# Altium PCB Li-IonBatteryManager.PcbDoc
Units mm, origin at the board's own origin, x right, y up, seen from the top; angles counter-clockwise.
Board outline 42.8 x 25.52 mm, 2 copper layers (Top Layer, Bottom Layer); 31 components, 24 nets, 122 pads, 61 vias.
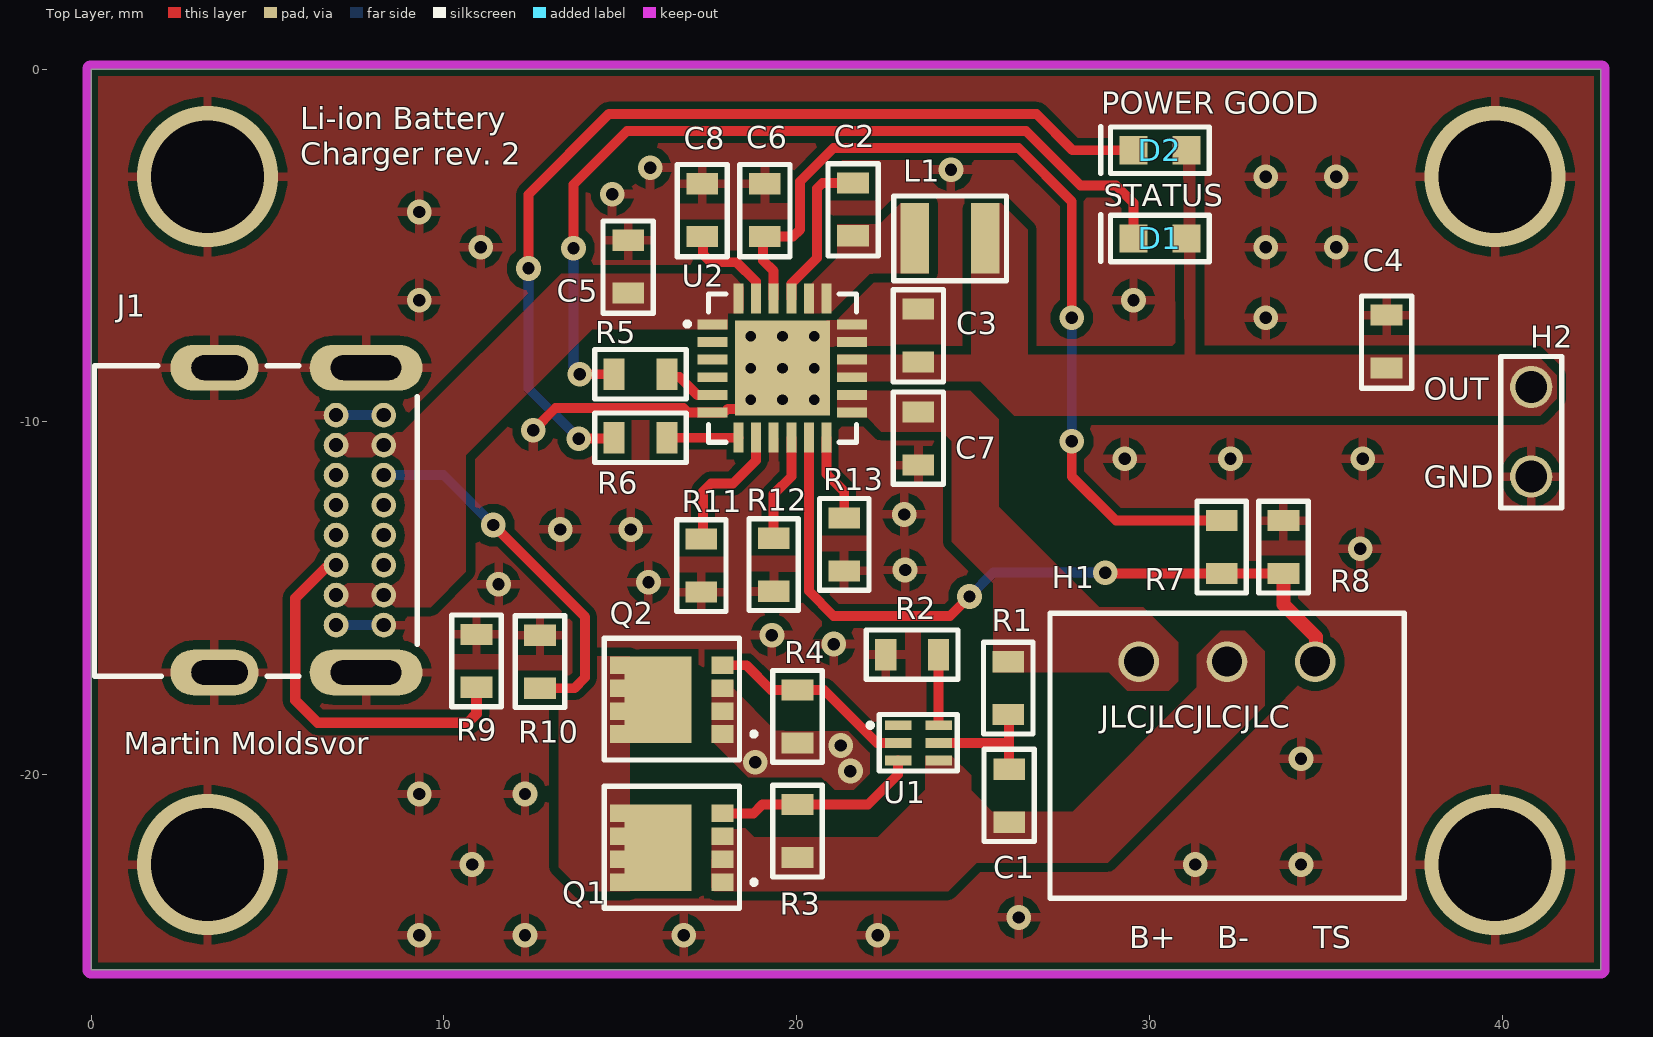
[diagram p0: Top Layer view]
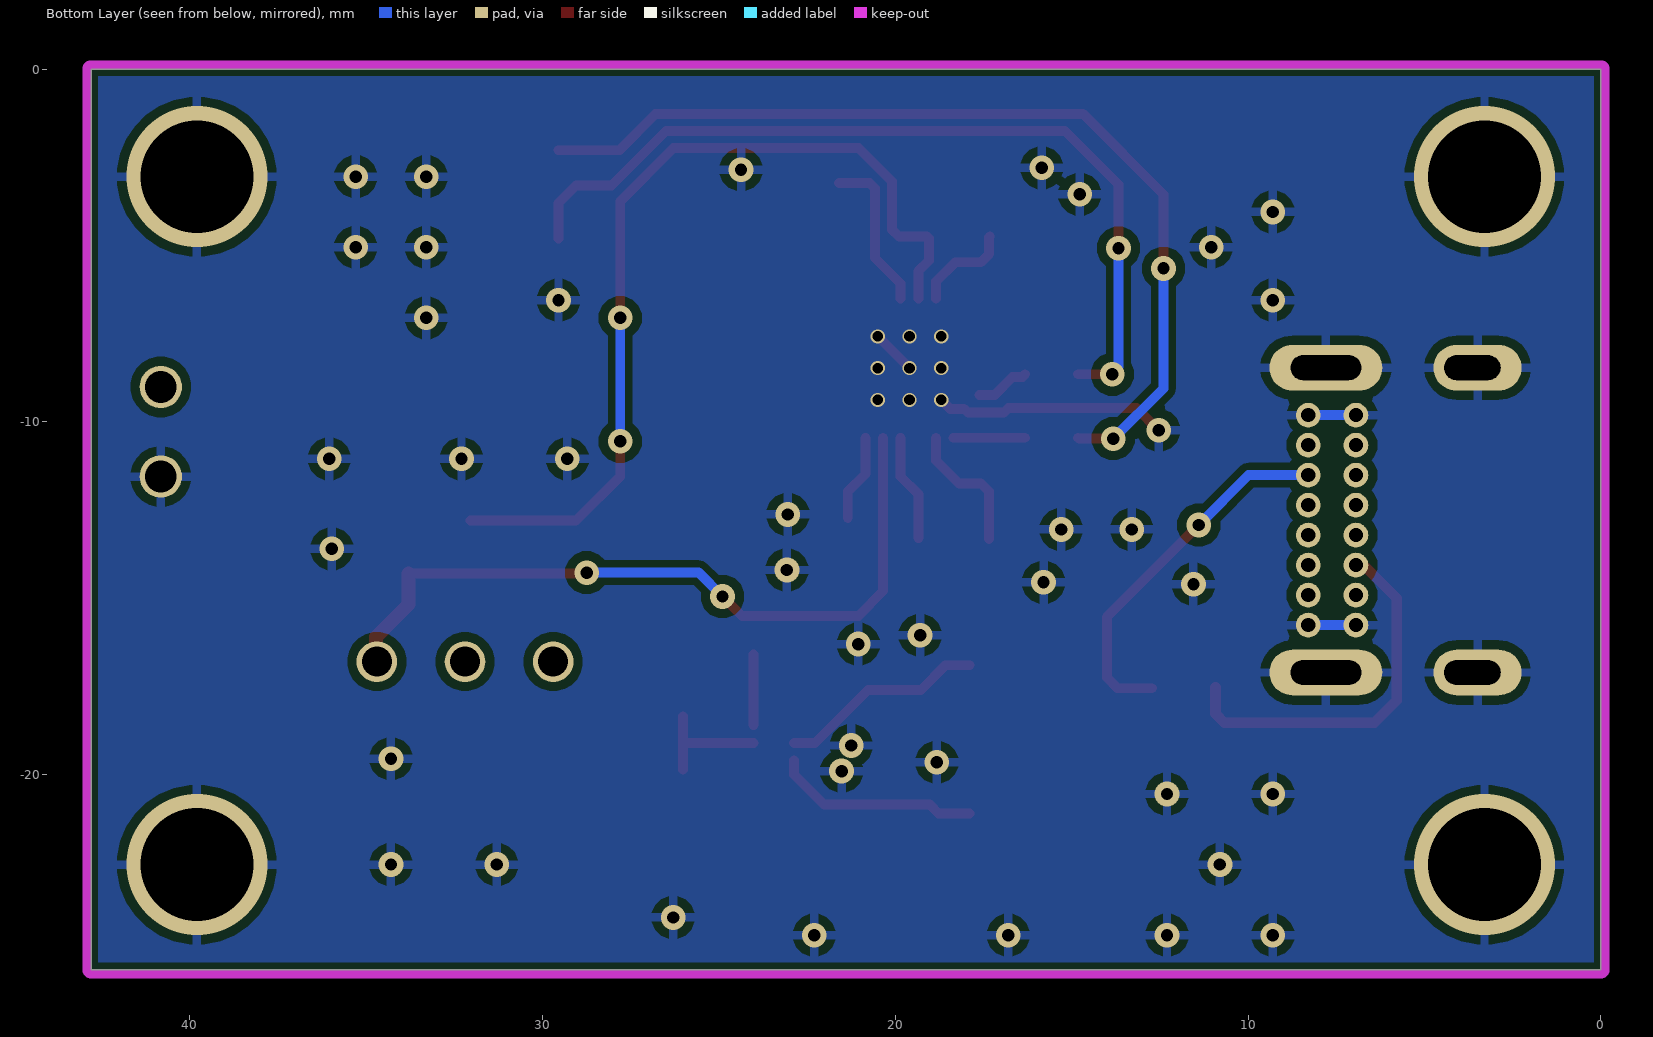
[diagram p1: Bottom Layer view, seen from below]
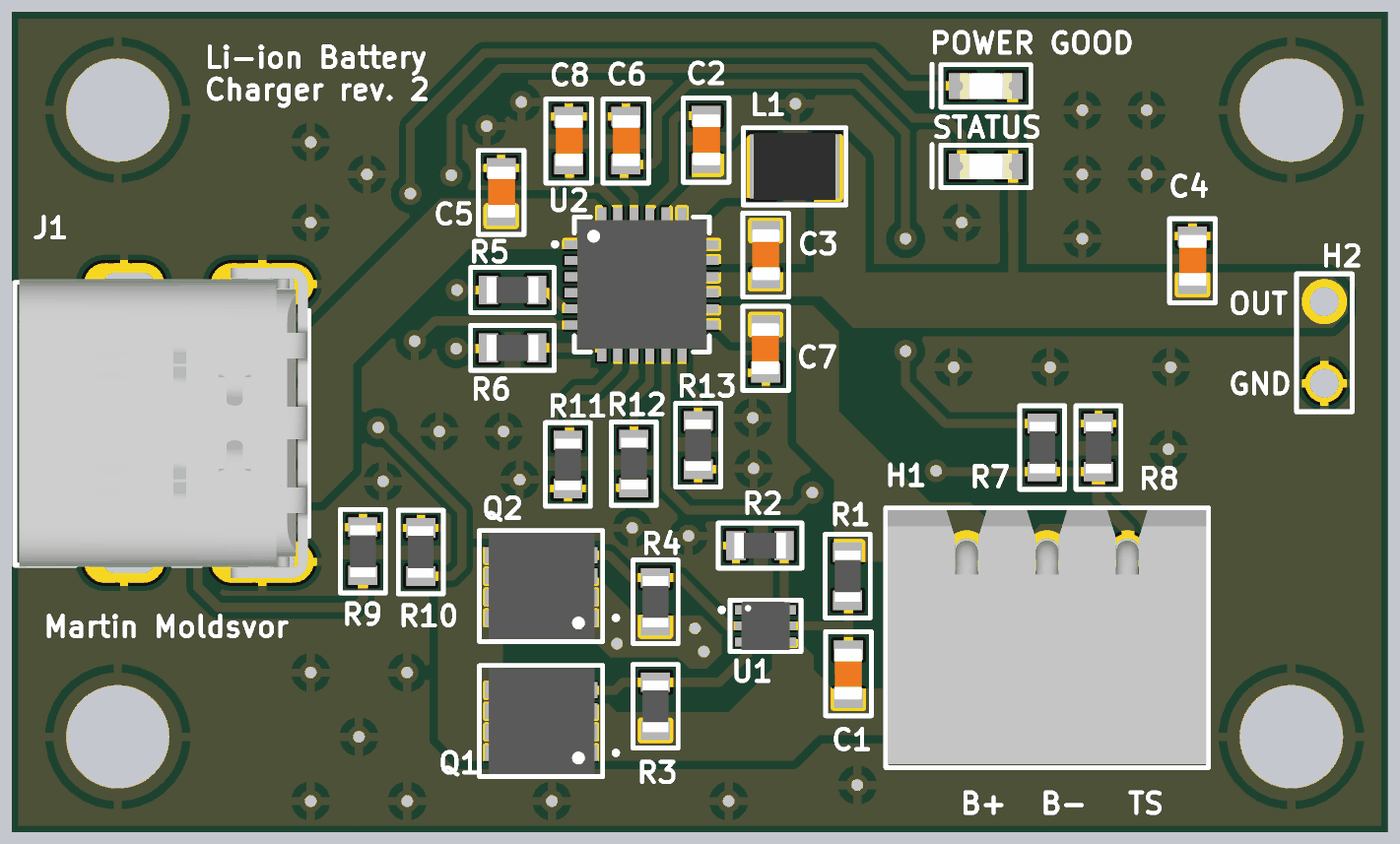
[diagram p2: 3D render of the assembled board from above, using the file's embedded part models]

## Layer stack, top to bottom
Top Solder: solder mask 0.0102, Solder Resist, Dk 3.5
Top Layer: signal copper 0.0356
Dielectric 1: dielectric 0.32, FR-4, Dk 4.8
Bottom Layer: signal copper 0.0356
Bottom Solder: solder mask 0.0102, Solder Resist, Dk 3.5

## Board outline
0,-25.525 42.8,-25.525 42.8,0 0,0

## Design rules (kind name [scope] priority, off if disabled: settings)
Clearance [All] p1: gap=0.254 ignorepadtopadclearanceinfootprint=FALSE except(0: Arc-Hole Track-Hole SMDPad-Hole THPad-Hole Via-Hole Fill-Hole Poly-Hole Region-Hole Text-Hole; 0.2: Arc-Arc Arc-Track Arc-Fill Arc-Poly Arc-Region Track-Track Track-Fill Track-Poly Track-Region SMDPad-SMDPad SMDPad-Fill SMDPad-Poly SMDPad-Region)
HoleSize [All] p1: absolutevalues=TRUE maxlimit=3.2 minlimit=0.025 maxpercent=80.000 minpercent=20.000
PolygonConnect PolygonConnect2 [(InNet('CELL-') OR InNet('PACK+') OR InNet('PACK-') OR InNet('NetQ1_5') OR InNet('VBUS') OR InNet('SW') OR InNet('C_BAT') OR InNet('SYS') OR IsNamedPolygon('PACK_GND_POUR') OR IsNamedPolygon('GND_CHARGER_POUR') OR IsNamedPolygon('GND_CHARGER_IC_POUR'))] p1: connectstyle=Direct reliefconductorwidth=0.254 reliefentries=4 polygonreliefangle="90 Angle" airgapwidth=0.254
PolygonConnect [All] p2: connectstyle=Relief reliefconductorwidth=0.254 reliefentries=4 polygonreliefangle="90 Angle" airgapwidth=0.254
RoutingVias [All] p1: holewidth=0.711 width=1.27 viastyle="Through Hole" minholewidth=0.711 minwidth=1.27 maxholewidth=0.711 maxwidth=1.27
SolderMaskExpansion [All] p1: expansion=0.102 istentingtop=FALSE
Width [All] p1: maxlimit=0.6 minlimit=0.2 preferedwidth=0.3 minimp=50.000000 maximp=50.000000 favimp=50.000000
29 further rules are at their usual default settings.

## Classes and differential pairs
component class BatteryManagerRev2: C1 C2 C3 C6 C8 D1 D2 H1 H2 J1 L1 Q1 Q2 R1 R2 R3 R4 R5 R6 R7 R8 R9 R10 R11 R12 R13 U1 U2

## Components (designator, comment, footprint, x,y, rotation, side; value= is the part's Value field where it differs from the comment)
C1 "0.1uF" "0603 Capacitor" 26.025,-20.6 r90 top
C2 "47nF" "0603 Capacitor" 21.6,-3.975 r270 top
C3 "Capacitor" "0603 Capacitor" 23.45,-7.55 r270 top
C4 "Capacitor" "0603 Capacitor" 36.725,-7.725 r270 top
C5 "1uF" "0603 Capacitor" 15.225,-5.6 r270 top
C6 "4.7uF" "0603 Capacitor" 19.1,-4 r270 top
C7 "10uF" "0603 Capacitor" 23.45,-10.475 r90 top
C8 "10uF" "0603 Capacitor" 17.325,-4 r270 top
D1 "STATUS" "0603 LED" 30.3,-4.8 r180 top
D2 "POWER GOOD" "0603 LED" 30.3,-2.3 r180 top
H1 "22-05-7035" "Molex Header 3" 29.7,-16.8 r0 top
H2 "Header 2x1" "HEADER 2x1" 40.825,-9.01 r270 top
J1 "2137160001" "USB TYPE C Molex" 8.295,-9.81 r270 top
L1 "1uH" SRP2510A 23.35,-4.8 r0 top
Q1 "CSD16406Q3" CSD16406Q3 17.9,-23.045 r180 top
Q2 "CSD16406Q3" CSD16406Q3 17.9,-18.845 r180 top
R1 "330R" "0603 Resistor" 26,-17.55 r90 top
R2 "2.2k" "0603 Resistor" 23.275,-16.6 r0 top
R3 "5M" "0603 Resistor" 20.025,-21.6 r90 top
R4 "5M" "0603 Resistor" 20.025,-18.35 r90 top
R5 "10k" "0603 Resistor" 15.575,-8.65 r180 top
R6 "10k" "0603 Resistor" 15.575,-10.45 r180 top
R7 "5.3k" "0603 Resistor" 32.05,-13.55 r90 top
R8 "31.14k" "0603 Resistor" 33.8,-13.55 r270 top
R9 "5.1k 10%" "0603 Resistor" 10.925,-16.775 r270 top
R10 "5.1k 10%" "0603 Resistor" 12.725,-16.8 r270 top
R11 "160R" "0603 Resistor" 17.3,-14.075 r90 top
R12 "226R" "0603 Resistor" 19.35,-14.05 r90 top
R13 "FLOAT or 10k" "0603 Resistor" 21.35,-13.475 r90 top
U1 "BQ29700DSET" BQ297xx 22.875,-18.6 r0 top
U2 "BQ25616JRTWR" BQ25616 19.6,-8.475 r0 top

## Footprints (in the part's own frame and the unit in brackets; to place one, negate y for a bottom-side part, rotate by r counter-clockwise, add the part's x,y. Pads: shape width x height; smd on the part's side, far side on the other; paste and mask are expansions set on the pad)
"0603 Capacitor" [mm]
  rect 0.6x0.9 smd: 1(-0.75,0) 2(0.75,0)
  silkscreen extent -1.3,-0.71 1.32,0.71, body extent -0.8,-0.42 0.8,0.45, height 0.81
"0603 LED" [mm]
  rect 0.8x0.8 smd: 1(-0.75,0) 2(0.75,0)
  silkscreen extent -1.4,-0.67 1.68,0.66, body extent -0.8,-0.4 0.8,0.4, height 0.56
"0603 Resistor" [mm]
  rect 0.6x0.9 smd: 1(-0.75,0) 2(0.75,0)
  silkscreen extent -1.3,-0.7 1.3,0.7, body extent -0.8,-0.4 0.8,0.4, height 0.56
BQ297xx [mm]
  rect 0.75x0.28 smd mask+0.05: 1(0,0) 2(0,-0.5) 3(0,-1) 4(1.15,-1) 5(1.15,-0.5) 6(1.15,0)
  silkscreen extent -0.84,-1.3 1.68,0.3, body extent -0.17,-1.25 1.33,0.25, height 0.81
BQ25616 [mm]
  rect 0.85x0.28 smd mask+0.07: 1(-1.984,1.24) 2(-1.984,0.74) 3(-1.984,0.24) 4(-1.984,-0.26) 5(-1.984,-0.76) 6(-1.984,-1.26) 13(1.966,-1.26) 14(1.966,-0.76) 15(1.966,-0.26) 16(1.966,0.24) 17(1.966,0.74) 18(1.966,1.24)
  rect 0.28x0.85 smd mask+0.07: 7(-1.25,-1.975) 8(-0.75,-1.975) 9(-0.25,-1.975) 10(0.25,-1.975) 11(0.75,-1.975) 12(1.25,-1.975) 19(1.25,1.975) 20(0.75,1.975) 21(0.25,1.975) 22(-0.25,1.975) 23(-0.75,1.975) 24(-1.25,1.975)
  rect 2.7x2.7 smd paste-3.95 mask+0.07: 25(0,0)
  silkscreen extent -2.76,-2.1 2.1,2.1, body extent -2,-2 2,2, height 0.81
CSD16406Q3 [mm]
  rect 0.63x0.5 smd mask+0.05: 1(0,0.005) 1(0,-0.645) 1(0,-1.295) 4(0,-1.945) 5(2.87,-1.295) 5(2.87,-0.645) 5(2.87,0.005) 5(2.87,-1.945)
  rect 1.9x2.45 smd mask+0.05: 5(1.825,-0.97)
  silkscreen extent -0.95,-2.71 3.35,0.74, body extent -0.23,-2.64 3.07,0.66, height 1.11
"HEADER 2x1" [mm]
  round 1.2 hole 0.9: 1(0,0) 2(2.54,0)
  silkscreen extent -0.86,-0.86 3.43,0.86
"Molex Header 3" [mm]
  round 1.15 hole 0.85 mask+0.102: 1(0,0) 2(2.5,0) 3(5,0)
  silkscreen extent -2.51,-6.71 7.52,1.37, body extent -2.45,-6.6 7.45,1.3, height 4.91
SRP2510A [mm]
  rect 0.8x2 smd: 1(0,0) 2(2,0)
  silkscreen extent -0.6,-1.2 2.6,1.2, body extent -0.29,-1.04 2.29,1.05, height 0.97
"USB TYPE C Molex" [mm]
  round 0.7 hole 0.4: A1(0,0) A1(0,-1.35) A4(0.85,0) A4(0.85,-1.35) A5(1.7,0) A6(2.55,0) A7(3.4,0) A8(4.25,0) B1(5.95,-1.35) B1(5.95,0) B4(5.1,-1.35) B4(5.1,0) B5(4.25,-1.35) B6(3.4,-1.35) B7(2.55,-1.35) B8(1.7,-1.35)
  oval 1.3x3.2 hole 0.7 slot 2 at 90 deg: SHIELD(-1.345,-0.5) SHIELD(7.295,-0.5)
  oval 1.3x2.5 hole 0.7 slot 1.6 at 90 deg copper offset 0,-0.15: SHIELD(-1.345,-4.65) SHIELD(7.295,-4.65)
  silkscreen extent -1.4,-8.2 7.4,0.95, body extent -1.84,-8.06 7.8,0.91, height 3.17

## Part data
C1 C2 C5 C6 C7 C8: library part Capacitor
D1 D2: library part LED
H1: "Header 2.5mm SPOX,  WTB,  RA,  F/lock,  3w", Color=Natural, Contact Resistance=20mR, Current Rating=3A, Flammability Rating="UL94 V-0", Insulation Resistance=1GR, Manufacturer 1=Molex, Max Operating Temperature=105°C, Max Voltage Rating (AC)=250V, Max Voltage Rating (DC)=250.25kV, Min Operating Temperature=-40°C, Package Quantity=20000, Supplier Part Number 1=WM18901-ND, Test Voltage=1kV, Category="Headers and Wire Housings", ComponentLink1Description=https://datasheet.ciiva.com/30128/225440022057035-pcb-headers-30128301.pdf?src-supplier=Onlinecomponents.com, ComponentLink1URL=https://datasheet.ciiva.com/30128/225440022057035-pcb-headers-30128301.pdf?src-supplier=Onlinecomponents.com, ComponentLink2Description=https://datasheet.ciiva.com/11746/0900766b80da772d-11746287.pdf?src-supplier=RSComponents, ComponentLink2URL=https://datasheet.ciiva.com/11746/0900766b80da772d-11746287.pdf?src-supplier=RSComponents, ComponentLink3Description=https://datasheet.ciiva.com/5153/0022057035-pcb-headers-158546-5153221.pdf?src-supplier=Mouser, ComponentLink3URL=https://datasheet.ciiva.com/5153/0022057035-pcb-headers-158546-5153221.pdf?src-supplier=Mouser, ComponentLink4Description=https://datasheet.ciiva.com/19461/1965939-19461711.pdf?src-supplier=Jameco, ComponentLink4URL=https://datasheet.ciiva.com/19461/1965939-19461711.pdf?src-supplier=Jameco, ComponentLink5Description=https://datasheet.ciiva.com/7167/1869086-7167685.pdf?src-supplier=Newark, ComponentLink5URL=https://datasheet.ciiva.com/7167/1869086-7167685.pdf?src-supplier=Newark, Connector Type=Header, Contact Finish - Mating=TIN, Contact Gender=Male, Contact Material=Brass, Contact Plating=Tin,Copper, Contact Shape=Circular, Contact Type="Male Pin", Depth=7.9mm, Fastening Type=Detent, Gender=Male, Glow Wire Compliant=Non-compliant, Height=4.9mm, Housing Color=Natural, Housing Material=Nylon, Insulation Color=Natural, Insulation Material=Nylon, Lead Free="Lead Free", Length=9.9mm, Manufacturer Part Number 1=22-05-7035, Max Current Rating=3A, Mount="Through Hole", Number of Circuits=3, Number of Contacts=3, Number of Poles=3, Number of Positions=3, Number of Rows=1, Orientation="Right Angle", Packaging=Bulk, Pitch=2.5mm, Pricing 1="1=0.26000, 10=0.20600, 100=0.14770, 1000=0.11562, 5000=0.10278, 10000=0.09314 (USD)", Radiation Hardening=No, REACH SVHC=Unknown, RoHS=Yes, RoHS Compliant=Yes, Series="Mini-SPOX 5268", Shrouded="Yes (With)", Stock 1=4209, Supplier 1=Digi-Key, Termination=Solder, Voltage Rating=250V, Voltage Rating (DC)=250V
J1: "Type C Receptacle DIP 16PIN", Manufacturer 1=Molex, Supplier Part Number 1=900-2137160001CT-ND, Manufacturer Part Number 1=2137160001, Pricing 1="1=1.05000, 10=0.87100, 100=0.72600 (USD)", Stock 1=7827, Supplier 1=Digi-Key
L1: library part SRP2510A-1R0M, "BOURNS - SRP2510A-1R0M - INDUCTOR, 1UH, 3A, 20%, SHIELDED", Case Code (Imperial)=1008, Case Code (Metric)=2520, Current Rating=3A, DC Resistance (DCR)=54mR, Manufacturer 1=Bourns, Max Operating Temperature=125°C, Min Operating Temperature=-40°C, Ratings=AEC-Q200, Resistor Type=Wirewound, Saturation Current=3.5A, Self Resonant Frequency=94MHz, Supplier Part Number 1=SRP2510A-1R0MCT-ND, Test Frequency=1MHz, Tolerance=20%, Case/Package=1008, Category="Fixed Inductors", ComponentLink1Description=http://www.farnell.com/datasheets/2330876.pdf?src-supplier=Farnell, ComponentLink1URL=http://www.farnell.com/datasheets/2330876.pdf?src-supplier=Farnell, ComponentLink2Description=http://www.farnell.com/datasheets/2330876.pdf?src-supplier=Newark, ComponentLink2URL=http://www.farnell.com/datasheets/2330876.pdf?src-supplier=Newark, ComponentLink3Description=https://www.bourns.com/docs/Product-Datasheets/srp2510a.pdf?src-supplier=Digi-Key, ComponentLink3URL=https://www.bourns.com/docs/Product-Datasheets/srp2510a.pdf?src-supplier=Digi-Key, Core Material=Ferrite, Inductance=1uH, Manufacturer Part Number 1=SRP2510A-1R0M, Mount="Surface Mount", Packaging="Cut Tape", Pricing 1="1=0.53000, 10=0.46200, 25=0.42880, 50=0.36300, 100=0.33000, 250=0.31020, 500=0.27720, 1000=0.22440 (USD)", RoHS=Yes, RoHS Compliant=Yes, Shielding=Shielded, Stock 1=5280, Supplier 1=Digi-Key
Q1 Q2: "TEXAS INSTRUMENTS - CSD16406Q3 - N CHANNEL MOSFET, 25V, 60A, SON", Case/Package=SON, Continuous Drain Current (ID)=60A, Drain to Source Breakdown Voltage=25V, Gate to Source Voltage (Vgs)=16V, Input Capacitance=1.1nF, Manufacturer 1="Texas Instruments", Max Operating Temperature=150°C, Max Power Dissipation=2.7W, Min Operating Temperature=-55°C, Package Quantity=1, Supplier Part Number 1=296-24251-1-ND, Threshold Voltage=1.7V, Category=MOSFETs, ComponentLink1Description=https://datasheet.ciiva.com/14192/slps202a-14192882.pdf?src-supplier=Avnet, ComponentLink1URL=https://datasheet.ciiva.com/14192/slps202a-14192882.pdf?src-supplier=Avnet, ComponentLink2Description=https://datasheet.ciiva.com/6387/csd16406q3-6387192.pdf?src-supplier=Digi-Key, ComponentLink2URL=https://datasheet.ciiva.com/6387/csd16406q3-6387192.pdf?src-supplier=Digi-Key, ComponentLink3Description=https://datasheet.ciiva.com/4438/slps202a-128073-4438442.pdf?src-supplier=Mouser, ComponentLink3URL=https://datasheet.ciiva.com/4438/slps202a-128073-4438442.pdf?src-supplier=Mouser, ComponentLink4Description=https://datasheet.ciiva.com/1255/csd16406q3-1255292.pdf?src-supplier=Newark, ComponentLink4URL=https://datasheet.ciiva.com/1255/csd16406q3-1255292.pdf?src-supplier=Newark, ComponentLink5Description=https://datasheet.ciiva.com/5832/483980-5832634.pdf?src-supplier=Farnell, ComponentLink5URL=https://datasheet.ciiva.com/5832/483980-5832634.pdf?src-supplier=Farnell, ComponentLink6Description=https://datasheet.ciiva.com/5832/483980-5832635.pdf?src-supplier=Farnell, ComponentLink6URL=https://datasheet.ciiva.com/5832/483980-5832635.pdf?src-supplier=Farnell, ComponentLink7Description=https://datasheet.ciiva.com/7643/1389665-7643292.pdf?src-supplier=Element14, ComponentLink7URL=https://datasheet.ciiva.com/7643/1389665-7643292.pdf?src-supplier=Element14, ComponentLink8Description=https://datasheet.ciiva.com/14423/slps202a-14423477.pdf?src-supplier=Avnet, ComponentLink8URL=https://datasheet.ciiva.com/14423/slps202a-14423477.pdf?src-supplier=Avnet, ComponentLink9Description=https://datasheet.ciiva.com/6387/csd16406q3-6387195.pdf?src-supplier=Digi-Key, ComponentLink9URL=https://datasheet.ciiva.com/6387/csd16406q3-6387195.pdf?src-supplier=Digi-Key, ComponentLink10Description=https://datasheet.ciiva.com/6387/csd16406q3-6387198.pdf?src-supplier=Digi-Key, ComponentLink10URL=https://datasheet.ciiva.com/6387/csd16406q3-6387198.pdf?src-supplier=Digi-Key, Contact Plating=Tin,Matte, Drain to Source Voltage (Vdss)=25V, Dual Supply Voltage=25V, Element Configuration=Single, Fall Time=4.8ns, Lead Free="Contains Lead", Manufacturer Part Number 1=CSD16406Q3, Mount="Surface Mount", Nominal Vgs=1.7V, Number of Elements=1, Number of Pins=8, Packaging="Tape and Reel", Polarity=N-CHANNEL, Power Dissipation=2.7W, Pricing 1="1=1.17000, 10=0.95900, 25=0.94160, 100=0.74610, 500=0.63244, 1000=0.51518 (USD)", Radiation Hardening=No, Rds On Max=5.3mR, REACH SVHC="No SVHC", Rise Time=12.9ns, RoHS=Yes, RoHS Compliant=Yes, Series=NexFET™, Stock 1=13974, Supplier 1=Digi-Key, Termination=SMD/SMT, Turn-Off Delay Time=8.5ns, Turn-On Delay Time=7.3ns
R1 R2 R3 R4 R5 R6 R7 R8 R9 R10 R11 R12 R13: library part Resistor
U1: "Li-Ion/Li Polymer Advanced Single-Cell Battery Protector IC Family 6-WSON -40 to 85", Case/Package=WFDFN, Manufacturer 1="Texas Instruments", Max Operating Temperature=85°C, Max Output Voltage=8V, Min Operating Temperature=-40°C, Min Supply Voltage=1.5V, Operating Supply Current=4uA, Output Current=5.5uA, Output Voltage=28V, Package Quantity=250, Supplier Part Number 1=296-37746-1-ND, Category="Battery Management", ComponentLink1Description=https://datasheet.ciiva.com/46402/1817247-46402997.pdf?src-supplier=Element14, ComponentLink1URL=2, Contact Plating=Gold, Fault Protection="Over Current,Short Circuit,Over/Under Voltage", Height=0.8mm, Lead Free="Lead Free", Length=1.55mm, Manufacturer Part Number 1=BQ29700DSET, Max Supply Voltage=8V, Mount="Surface Mount", Number of Batteries=1, Number of Cells=1, Number of Pins=6, Packaging="Tape and Reel", Pricing 1="1=0.69000, 10=0.60500, 25=0.56840, 100=0.43090 (USD)", Radiation Hardening=No, REACH SVHC="No SVHC", RoHS=Yes, RoHS Compliant=Yes, Stock 1=86, Supplier 1=Digi-Key, Weight=0.000342oz, Width=1.55mm
U2: Manufacturer 1="Texas Instruments", Supplier Part Number 1=296-BQ25616JRTWRCT-ND, Category="Battery Management", Manufacturer Part Number 1=BQ25616JRTWR, Pricing 1="1=3.10000, 10=2.78100, 25=2.62360, 100=2.23520, 250=2.09880, 500=1.83644, 1000=1.65330 (USD)", RoHS=Yes, Stock 1=553, Supplier 1=Digi-Key

## Via types
v1: diameter 0.7, hole 0.35, Top Layer to Bottom Layer, tented both sides, 48 vias
v2: diameter 0.4, hole 0.3, Top Layer to Bottom Layer, 9 vias
v3: diameter 4, hole 3.2, Top Layer to Bottom Layer, 4 vias

## Nets (pads, with @x,y where several pads share a name; then routed paths per layer and width w, separated by ;. In a path a pad name is that pad's centre, name@x,y a point inside that pad or via, vN(x,y) a via of type N, cw(c..) or ccw(c..) an arc to the next point about the centre after c; other vN are vias at no path point)
BTST: C2.1 U2.21 | length 4.5
  Top Layer w0.28: U2.21 19.85,-6.075 20.575,-5.35 20.575,-3.389 20.739,-3.225 C2.1
CC1: J1.A5 R10.2 | length 10.5
  Top Layer w0.28: v1(11.4,-12.925) 14,-15.525 14,-17.25 13.7,-17.55 R10.2
  Bottom Layer w0.28: J1.A5 9.985,-11.51 v1(11.4,-12.925)
CC2: J1.B5 R9.2 | length 10.7
  Top Layer w0.3: J1.B5 6.868,-14.137 6.652,-14.137 5.791,-14.998 5.791,-17.891 6.425,-18.525 10.675,-18.525 10.925,-18.275 R9.2
CELL-: C1.1 H1.2 Q1.1 R3.1 U1.4
COUT: Q2.4 R4.2 U1.2 | length 5.9
  Top Layer w0.28: Q2.4 18.575,-16.9 19.275,-17.6 R4.2 20.775,-17.6 22.275,-19.1 U1.2
DOUT: Q1.4 R3.2 U1.3 | length 5.8
  Top Layer w0.28: Q1.4 18.775,-21.1 19.025,-20.85 R3.2 22.025,-20.85 22.875,-20 U1.3
GND: C3.1 C4.1 C5.1 C6.1 C7.1 C8.1 H2.2 J1.A1 J1.B1 J1.SHIELD Q2.1 R2.1 R4.1 R8.1 R9.1 R10.1 R11.1 R12.1 R13.1 U2.6 U2.9 U2.17 U2.18 U2.25 | length 10.4
  Top Layer w0.28: v1(12.536,-10.239) 13.169,-9.606 16.788,-9.606 16.917,-9.735 17.943,-9.735 18.047,-9.631 18.444,-9.631 v2(18.7,-9.375) ; v2(19.6,-8.475) U2.25@20.34,-7.735
  Bottom Layer w0.28: J1.B1@6.945,-15.76 J1.B1@8.295,-15.76 ; J1.A1@6.945,-9.81 J1.A1@8.295,-9.81
  other v1: 9.3,-24.55 12.3,-24.55 16.8,-24.55 22.3,-24.55 26.3,-24.05 10.8,-22.55 31.3,-22.55 34.3,-22.55 9.3,-20.55 12.3,-20.55 21.525,-19.9 18.825,-19.65 34.3,-19.55 21.25,-19.175 21.05,-16.3 19.3,-16.05 11.55,-14.6 15.8,-14.55 23.075,-14.2 35.975,-13.6 13.3,-13.05 15.3,-13.05 23.05,-12.625 29.3,-11.05 32.3,-11.05 36.05,-11.05 33.3,-7.05 9.3,-6.55 29.55,-6.55 11.05,-5.05 33.3,-5.05 35.3,-5.05 9.3,-4.05 14.775,-3.55 33.3,-3.05 35.3,-3.05 24.375,-2.85 15.85,-2.8
  other v2: 19.6,-9.375 20.5,-9.375 18.7,-8.475 20.5,-8.475 18.7,-7.575 19.6,-7.575 20.5,-7.575
  other v3: 3.3,-22.55 39.8,-22.55 3.3,-3.05 39.8,-3.05
ICHG: R12.2 U2.10 | length 3.1
  Top Layer w0.28: R12.2 19.35,-12.05 19.85,-11.55 U2.10
ILIM: R11.2 U2.8 | length 3.9
  Top Layer w0.28: R11.2@17.35,-13.325 17.35,-11.975 17.575,-11.75 18.2,-11.75 18.85,-11.1 U2.8
NetC8_2: C8.2 U2.23 | length 2.8
  Top Layer w0.28: C8.2 17.35,-4.775 17.35,-5.25 17.575,-5.475 18.3,-5.475 18.85,-6.025 U2.23
NetD1_2: D1.2 R5.2 | length 24.8
  Top Layer w0.28: v1(13.675,-5.075) 13.675,-3.275 15.195,-1.755 26.505,-1.755 28.05,-3.3 29.05,-3.3 29.55,-3.8 D1.2 ; v1(13.85,-8.65) R5.2
  Bottom Layer w0.28: v1(13.675,-5.075) 13.675,-8.443 13.85,-8.618 v1(13.85,-8.65)
NetD2_2: D2.2 R6.2 | length 27
  Top Layer w0.28: v1(12.4,-5.65) 12.4,-3.55 14.675,-1.275 26.8,-1.275 27.825,-2.3 D2.2 ; v1(13.825,-10.475) 14.8,-10.475 R6.2
  Bottom Layer w0.28: v1(12.4,-5.65) 12.4,-9.05 v1(13.825,-10.475)
NetQ1_5: Q1.5 Q2.5
P_BAT: C1.2 R1.1 U1.5 | length 3.5
  Top Layer w0.28: U1.5 26.025,-19.1 ; C1.2 26.025,-19.1 ; R1.1@26.025,-18.35 26.025,-19.1
PACK+: C7.2 H1.1 R1.2 U2.13 U2.14
PG: R6.1 U2.7 | length 2
  Top Layer w0.28: R6.1 U2.7
REGN: C6.2 R7.2 U2.22 | length 25.6
  Top Layer w0.28: U2.22 19.35,-5.725 19.05,-5.425 19.05,-4.8 C6.2 19.9,-4.75 20.095,-4.555 20.095,-3.19 21.05,-2.235 26.285,-2.235 27.8,-3.75 v1(27.8,-7.05) ; v1(27.8,-10.55) 27.8,-11.55 29.05,-12.8 R7.2
  Bottom Layer w0.28: v1(27.8,-10.55) v1(27.8,-7.05)
STAT: R5.1 U2.5 | length 1.5
  Top Layer w0.28: R5.1 16.4,-8.725 16.675,-8.725 17.185,-9.235 U2.5
SW: C2.2 L1.1 U2.19 U2.20
SYS: C3.2 C4.2 D1.1 D2.1 H2.1 L1.2 U2.15 U2.16
TS: H1.3 R7.1 R8.2 U2.11 | length 21.5
  Top Layer w0.28: U2.11 20.35,-14.8 21.05,-15.5 24.35,-15.5 v1(24.9,-14.95) ; v1(28.75,-14.275) 28.775,-14.3 R7.1 R8.2 ; H1.3 H1.3@34.725,-16.775
  Top Layer w0.4: R8.2 33.8,-15.175 34.725,-16.1 H1.3@34.725,-16.775
  Bottom Layer w0.28: v1(24.9,-14.95) 25.575,-14.275 v1(28.75,-14.275)
V-: R2.2 U1.6 | length 2
  Top Layer w0.28: U1.6 R2.2
VBUS: C5.2 J1.A4 J1.B4 U2.1 U2.24
VSET: R13.2 U2.12 | length 2.5
  Top Layer w0.28: U2.12 20.85,-11.475 21.35,-11.975 R13.2
pads on no net: J1.A6 J1.A7 J1.A8 J1.B6 J1.B7 J1.B8 U1.1 U2.2 U2.3 U2.4

## Polygon pours and split planes (outlines as drawn)
CELL- on Top Layer "Top Layer-CELL-" (solid, pour order 6): 25.1,-22.5 28.825,-22.5 33.275,-18.05 33.275,-16.5 32.7,-15.925 32.025,-15.925 31.35,-16.6 31.35,-17.525 27.825,-21.05 25.55,-21.05 24.95,-20.45 24.95,-20.025 24.4,-19.475 23.65,-19.475 23.65,-20.425 22.3,-21.775 18.8,-21.775 18.55,-21.525 17.6,-21.525 17.575,-23.3 24.3,-23.3
GND on Top Layer "GND_CHARGER_IC_POUR" (solid, pour order 3): 20.825,-7.875 21.475,-7.875 24.7,-7.875 24.7,-6.05 22.2,-6.05 21.35,-6.9 21.125,-7.125 20.825,-7.125
SYS on Top Layer "Top Layer-SYS" (solid, pour order 1): 21.15,-8.85 25.2,-8.85 26.175,-9.825 41.075,-9.825 41.55,-9.35 41.55,-8.675 40.975,-8.1 32.75,-8.1 31.3,-8.1 31.3,-2.05 30.963,-2.05 30.998,-8.1 26.55,-8.1 26.55,-4.55 25.8,-3.8 25.3,-3.8 25.3,-3.975 24.95,-3.975 24.95,-8.1 21.15,-8.1
GND on Top Layer "GND_L01_P008" (solid, remove dead copper, pour order 8): 0,0 42.8,0 42.8,-25.525 0,-25.525
VBUS on Top Layer "Top Layer-VBUS" (solid, pour order 7): 9.7,-15.175 10.625,-14.25 10.625,-10.95 14.2,-7.375 18.05,-7.375 18.05,-6.925 18.5,-6.925 18.5,-5.8 13.325,-5.8 8.825,-10.3 6.95,-10.3 6.65,-10.6 6.65,-10.775 6.875,-11 8.425,-11 8.425,-14.575 6.9,-14.575 6.65,-14.825 6.65,-15.025 6.875,-15.25 9.625,-15.25
GND on Top Layer "PACK_GND_POUR" (solid, pour order 2): 17.6,-17.3 18.2,-17.3 19.675,-18.775 21.525,-18.775 22.075,-19.325 22.075,-19.975 21.625,-20.425 21.05,-20.425 20.7,-20.075 19.325,-20.075 18.575,-20.075 17.6,-19.1
PACK+ on Top Layer "Top Layer-PACK+" (solid, pour order 5): 22,-9.875 22.4,-10.275 24.125,-10.275 24.4,-10.55 24.4,-13.4 25.575,-14.575 25.575,-17.1 28.85,-17.1 29.375,-17.625 30.55,-17.625 30.825,-17.35 30.825,-16.25 29.825,-15.25 28.575,-15.25 25.725,-12.4 25.725,-9.925 24.925,-9.125 24.175,-9.125 21.15,-9.125 21.15,-9.875 21.19,-9.875
NetQ1_5 on Top Layer "NETQ1_5_L01_P000" (solid, pour order 0): 13.25,-16.65 13.25,-22.625 13.925,-23.3 15.275,-23.3 15.275,-16.65
SW on Top Layer "SW_L01_P004" (solid, pour order 4): 20.225,-6.925 20.225,-6.275 21.15,-5.35 21.15,-4.4 22.35,-4.4 22.95,-3.8 23.75,-3.8 23.75,-5.8 22.075,-5.8 20.95,-6.925
GND on Bottom Layer "GND_CHARGER_POUR" (solid, pour order 29): 17.575,-6.475 17.575,-10.5 21.6,-10.5 21.6,-6.475
GND on Bottom Layer "GND_L02_P025" (solid, remove dead copper, pour order 25): 0,0 42.8,0 42.8,-25.525 0,-25.525

## Keep-outs
Keep-Out Layer:
  lines w0.25: -0.125,-25.525 ccw(c0,-25.525) 0,-25.65 ; -0.125,-25.525 ccw(c0,-25.525) 0,-25.65 ; -0.125,-25.525 -0.125,0 ; -0.125,0 cw(c0,0) 0,0.125 ; -0.125,0 cw(c0,0) 0,0.125 ; 0,-25.65 42.8,-25.65 ; 0,0.125 42.8,0.125 ; 42.8,-25.65 ccw(c42.8,-25.525) 42.925,-25.525 ; 42.8,-25.65 ccw(c42.8,-25.525) 42.925,-25.525 ; 42.8,0.125 cw(c42.8,0) 42.925,0 ; 42.8,0.125 cw(c42.8,0) 42.925,0 ; 42.925,-25.525 42.925,0

## Other copper
Top Layer:
  pour cut-out: 31.3,-13.3 32.8,-13.3 32.8,-13.8 31.3,-13.8
  pour cut-out: 30.075,-1.7 30.6,-1.7 30.6,-2.825 30.8,-2.825 30.8,-4.3 30.525,-4.3 30.525,-5.4 30.05,-5.4 30.05,-4.325 29.775,-4.325 29.775,-3.7 29.05,-2.975 29.05,-2.775 30.075,-2.775
  pour cut-out: 33.425,-18.25 34.225,-17.45 34.225,-17.25 34,-17.025 34,-16.575 34.325,-16.25 34.325,-16.1 33.475,-15.25 33.475,-14.7 33.3,-14.7 33.15,-14.55 32.675,-14.55 32.525,-14.7 31.525,-14.7 31.35,-14.525 29.1,-14.525 28.7,-14.925 28.7,-15.05 29.8,-15.05 30.975,-16.225 30.975,-16.625 31.1,-16.625 31.875,-15.85 32.775,-15.85 33.425,-16.5
  pour cut-out: 17.65,-19.1 18.725,-20.175 20.825,-20.175 21.175,-20.525 19.375,-20.525 19.3,-20.6 18.95,-20.6 18.7,-20.85 17.45,-20.85 17.45,-21.425 17.125,-21.425 17.125,-20.725 15.475,-20.725 15.475,-19.1
  pour cut-out: 18.2,-17.35 18.2,-17.55 19.4,-18.75 20.8,-18.75 20.8,-18.05 20.7,-17.95 19.2,-17.95 18.5,-17.25
Bottom Layer:
  pour cut-out: 7.95,-9.975 7.95,-15.55 7.325,-15.55 7.325,-9.975

## Silkscreen, mask and mechanical layers (free items; w line width, h text height)
Top Overlay:
  text "Li-ion Battery" at 5.927,-1.711 h0.64
  text "Charger rev. 2" at 5.927,-2.711 h0.64
  text "OUT" at 37.777,-9.373 h0.64
  text "GND" at 37.777,-11.873 h0.64
  text "JLCJLCJLCJLC" at 28.602,-18.673 h0.64
  text "Martin Moldsvor" at 0.927,-19.423 h0.64
  text "B+" at 29.427,-24.923 h0.64
  text "B-" at 31.927,-24.923 h0.64
  text "TS" at 34.652,-24.923 h0.64